# Altium PCB Monitor.PcbDoc
Units mm, origin at the board's own origin, x right, y up, seen from the top; angles counter-clockwise.
Board outline 67.82 x 63.5 mm, 2 copper layers (Top Layer, Bottom Layer), stack 1.671 mm thick; 38 components, 28 nets, 87 pads, 4 vias.
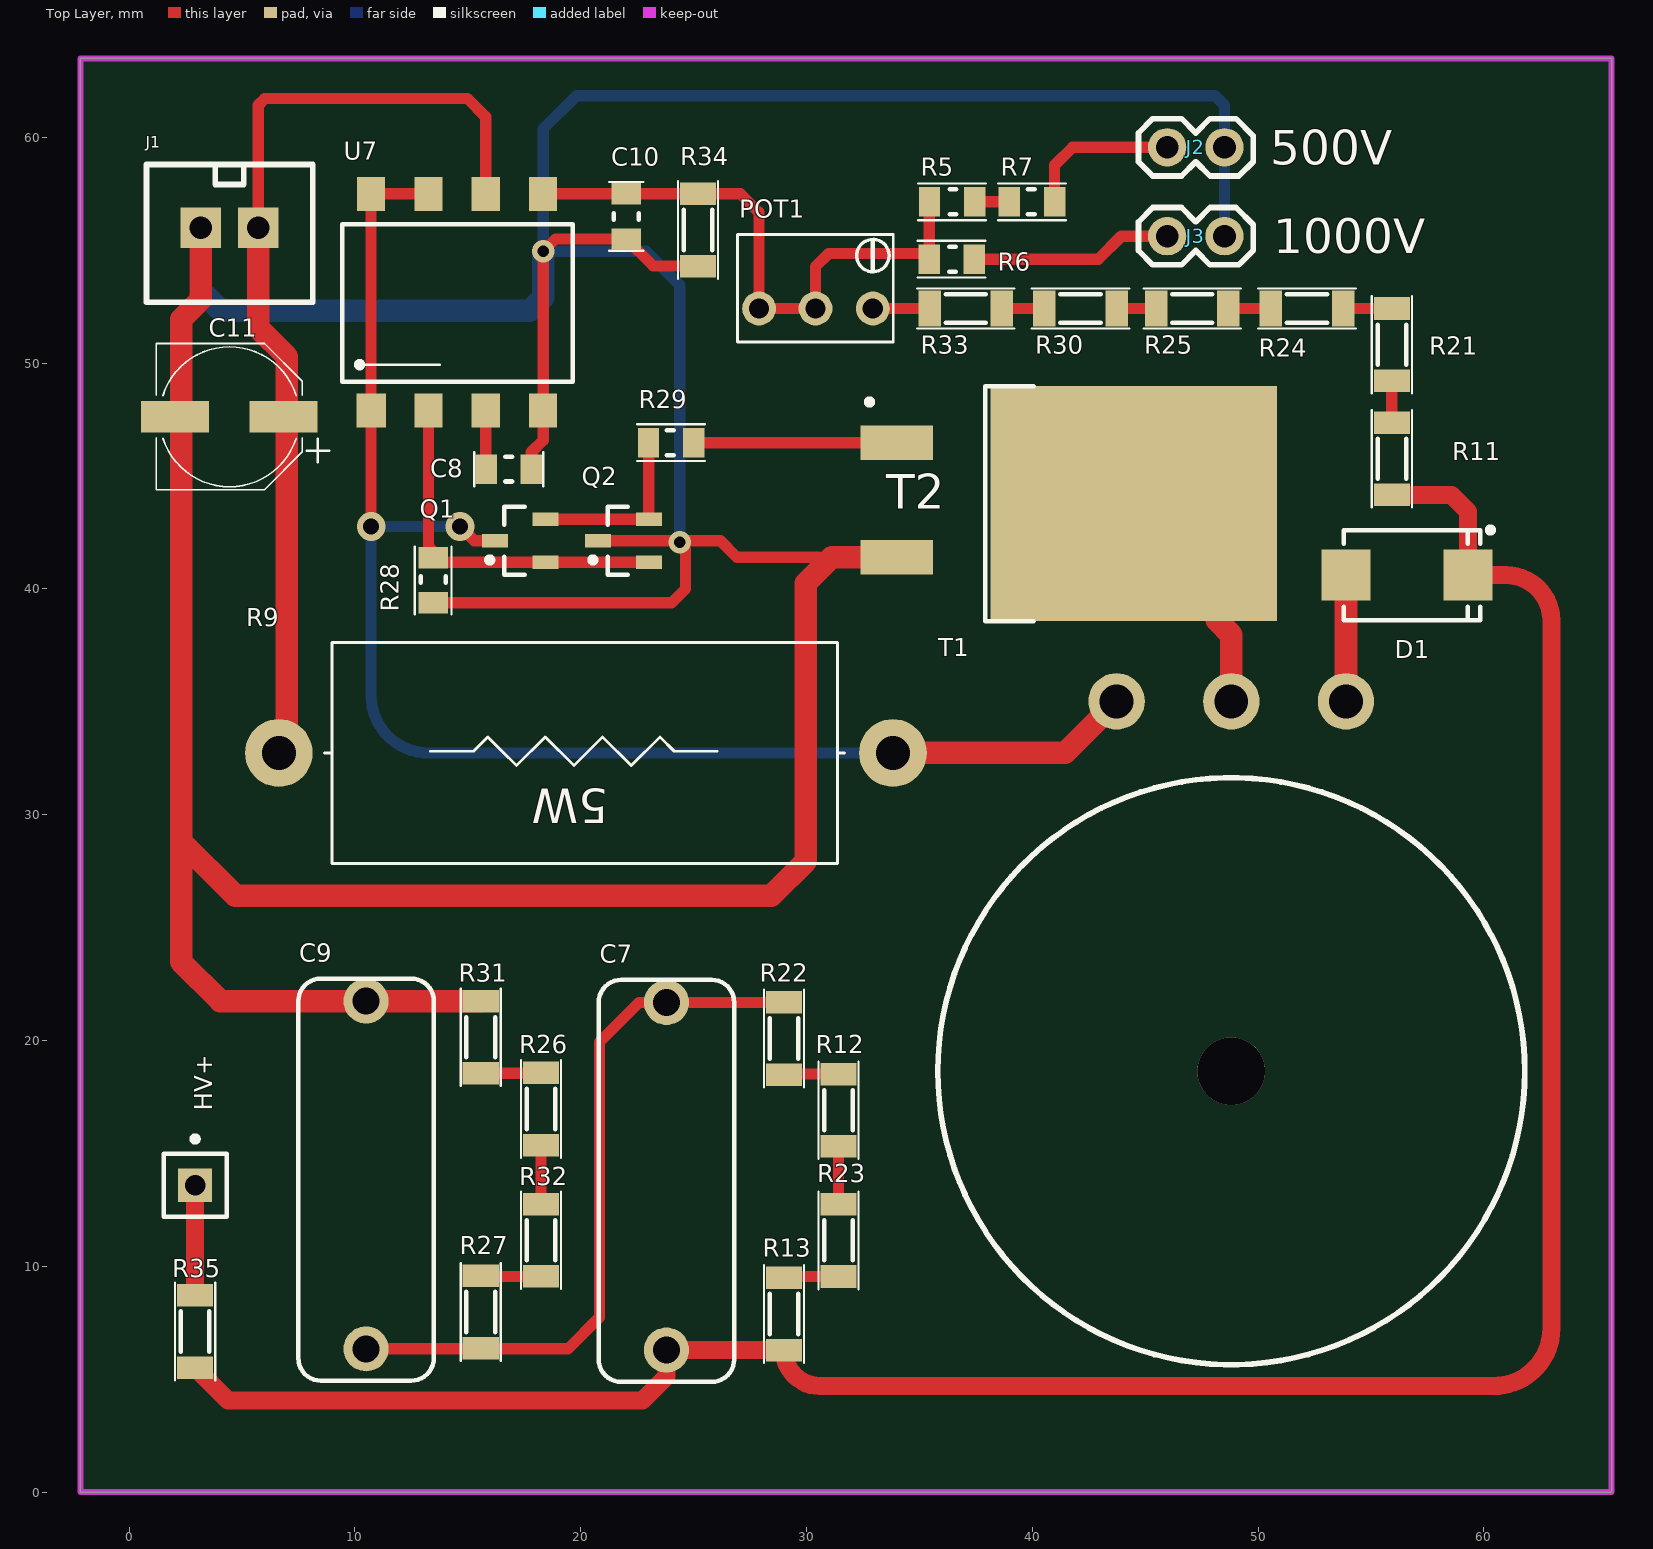
[diagram p0: Top Layer view]
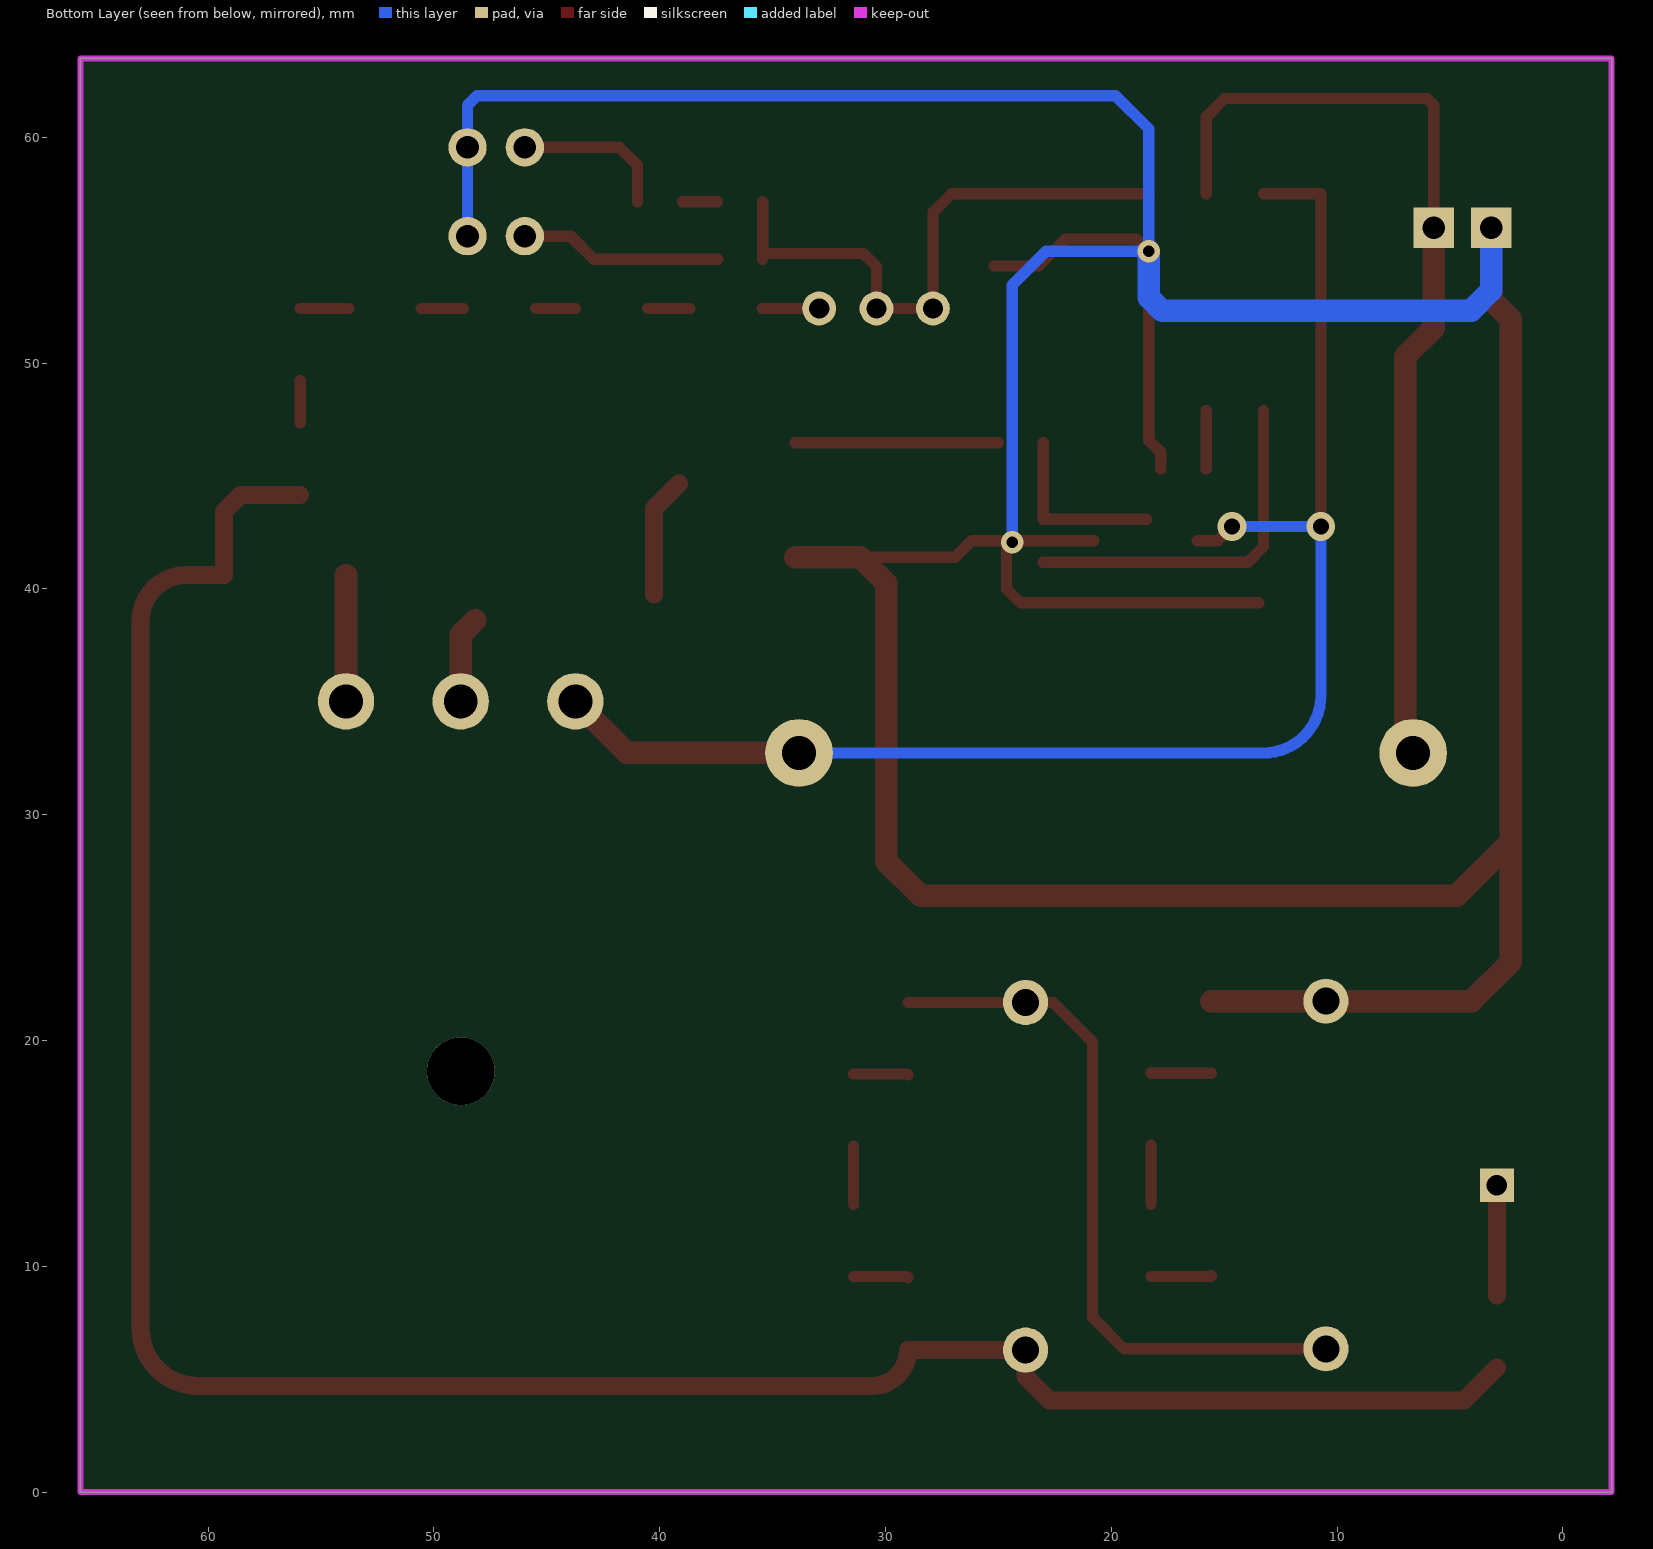
[diagram p1: Bottom Layer view, seen from below]

## Layer stack, top to bottom
Top Solder: solder mask 0.0102, Solder Resist, Dk 3.5
Top Layer: signal copper 0.0356
Dielectric 1: dielectric 1.6, FR-4, Dk 4.8
Bottom Layer: signal copper 0.0356
Bottom Solder: solder mask 0.0102, Solder Resist, Dk 3.5

## Board outline
-2.159,0 -2.159,63.5 65.659,63.5 65.659,0

## Design rules (kind name [scope] priority, off if disabled: settings)
Clearance Clearance_1 [(InNet('inprobe+') OR InNet('PROBE+') OR InNet('PROBE-'))] p1: gap=1 ignorepadtopadclearanceinfootprint=FALSE
Clearance [All] p2: gap=0.2 ignorepadtopadclearanceinfootprint=FALSE
ComponentClearance [All] p1: gap=0 collisioncheckmode=3 verticalgap=0 showdistances=FALSE
Height [All] p1: minheight=0 maxheight=500 prefheight=12.7
PolygonConnect PolygonConnect_1 [ISVIA] p1: connectstyle=Direct reliefconductorwidth=0.254 reliefentries=4 polygonreliefangle="90 Angle" airgapwidth=0.254
PolygonConnect [All] p2: connectstyle=Relief reliefconductorwidth=0.4 reliefentries=4 polygonreliefangle="90 Angle" airgapwidth=0.254
RoutingVias [All] p1: holewidth=0.5 width=1 viastyle="Through Hole" minholewidth=0.5 minwidth=1 maxholewidth=0.5 maxwidth=1
SolderMaskExpansion [All] p1: expansion=0.102 istentingtop=FALSE
Width [All] p1: maxlimit=1 minlimit=0.3 preferedwidth=0.5
28 further rules are at their usual default settings.

## Components (designator, comment, footprint, x,y, rotation, side; value= is the part's Value field where it differs from the comment)
C7 "100nF" CAP-POLY-15 23.796,21.689 r270 top
C8 "1nF" C805 16.811,45.311 r180 top
C9 "100nF" CAP-POLY-15 10.494,21.745 r270 top
C10 "1nF" C805 22.018,56.503 r90 top
C11 "470uF" CAP-SMD-6 1.143,50.8 r270 top
D1 "UF4007" DO-214AA 56.595,40.612 r270 top
HV+ "Plug" PIN1 2.921,13.589 r0 top
J1 "CONN-2" XH-2 5.715,56.007 r180 top
J2 "jumper" Selector 45.974,59.563 r0 top
J3 "jumper" Selector 45.974,55.626 r0 top
POT1 "POT" "Multi Turn V" 32.94,52.423 r90 top
Q1 "BC817-40" SOT-23 17.319,42.136 r180 top
Q2 "BC807-16" SOT-23 21.891,42.136 r180 top
R5 "680" R805 36.449,57.15 r180 top
R6 "68K" R805 36.433,54.61 r180 top
R7 "22K" R805 39.989,57.15 r0 top
R9 "0.1" RES-5w 20.229,32.738 r180 top
R11 "2.2M" R1206 55.927,45.768 r270 top
R12 "2.2M" R1206 31.416,16.914 r270 top
R13 "2.2M" R1206 29.003,7.889 r270 top
R21 "2.2M" R1206 55.927,50.823 r270 top
R22 "2.2M" R1206 29.003,20.089 r270 top
R23 "2.2M" R1206 31.416,11.148 r270 top
R24 "2.2M" R1206 52.168,52.423 r0 top
R25 "2.2M" R1206 47.088,52.423 r0 top
R26 "2.2M" R1206 18.241,16.97 r270 top
R27 "2.2M" R1206 15.574,7.978 r270 top
R28 "2.2K" R805 13.462,40.386 r270 top
R29 "100" R805 24.003,46.482 r0 top
R30 "2.2M" R1206 42.135,52.423 r0 top
R31 "2.2M" R1206 15.574,20.145 r270 top
R32 "2.2M" R1206 18.241,11.153 r270 top
R33 "2.2M" R1206 37.055,52.423 r0 top
R34 "68K" R1206 25.193,55.903 r90 top
R35 "4.7K" R1206 2.921,7.112 r270 top
T1 "Transformer 2-1" trans-26 48.815,18.641 r0 top
T2 "IRF540S" D2PAK-2 39.243,43.942 r90 top
U7 "MC34063AG" SOP-8 14.555,52.703 r90 top

## Footprints (in the part's own frame and the unit in brackets; to place one, negate y for a bottom-side part, rotate by r counter-clockwise, add the part's x,y. Pads: shape width x height; smd on the part's side, far side on the other; paste and mask are expansions set on the pad)
C805 [mm]
  rect 0.95x1.3 smd: 1(-1,0) 2(1,0)
  silkscreen extent -1.52,-0.76 1.52,0.76, body extent -1,-0.62 1,0.63, height 0.78
CAP-POLY-15 [mm]
  round 2 hole 1.2: 1(0,0) 2(15.4,0)
  silkscreen extent -1,-3 16.81,3, body extent -0.4,-2.89 16,2.91, height 11
CAP-SMD-6 [mil]
  rect 55x118 smd: 1(125,224) 2(125,35)
  silkscreen extent -3,2 252,304, body extent 5,-10 243,270, height 215
D2PAK-2 [mm]
  rect 1.524x3.2 smd: 1(2.54,5.25) 3(-2.54,5.25)
  rect 10.414x12.7 smd: 4(-0.16,-5.25)
  silkscreen extent -5.36,-0.81 5.04,6.57, body extent -5.5,-9.78 5.17,6.1, height 4.83
DO-214AA [mm]
  rect 2.26x2.16 smd: 1(0,-2.7) 2(0,2.7)
  silkscreen extent -2.12,-2.8 2,3.83, body extent -1.8,-2.7 1.8,2.7, height 2.3
"Multi Turn V" [mm]
  round 1.5 hole 0.9: 1(0,0) 2(0,2.54) 3(0,5.04)
  silkscreen extent -1.48,-0.9 3.28,5.99, body extent -1.42,-0.86 3.28,5.94, height 8.2
PIN1 [mm] "Connector; Plug"
  rect 1.5x1.5 hole 0.9: 1(0,0)
  silkscreen extent -1.4,-1.4 1.4,2.17
R805 [mm]
  rect 0.95x1.3 smd: 1(1,0) 2(-1,0)
  silkscreen extent -1.5,-0.81 1.5,0.81, body extent -1,-0.61 1,0.64, height 0.78
R1206 [mm]
  rect 1x1.6 smd: 1(1.6,0) 2(-1.6,0)
  silkscreen extent -2.16,-0.89 2.16,0.89, body extent -1.6,-0.8 1.6,0.8, height 1
RES-5w [mm]
  round 3 hole 1.5: 1(13.6,0) 2(-13.6,0)
  silkscreen extent -11.45,-4.9 11.58,4.9, body extent -13.15,-4.85 13.25,4.85, height 9.21
Selector [mm]
  round 1.7 hole 1: 1(2.54,0) 2(0,0)
  silkscreen extent -1.27,-1.27 3.81,1.27, body extent -1.24,-1.3 3.84,1.24, height 16.15
SOP-8 [mm]
  rect 1.5x1.3 smd: 1(-4.8,3.84)
  rect 1.5x1.25 smd: 2(-4.8,1.3) 3(-4.8,-1.24) 4(-4.8,-3.78) 5(4.8,-3.78) 6(4.8,-1.24) 7(4.8,1.3) 8(4.8,3.84)
  silkscreen extent -3.53,-5.1 3.45,5.11, body extent -4.97,-4.8 5.03,4.86, height 3.85
SOT-23 [mm]
  rect 1.15x0.6 smd: 1(-1.125,0.95) 2(-1.125,-0.95) 3(1.125,0)
  silkscreen extent -0.2,-1.5 1.47,1.5, body extent -1.13,-1.5 1.13,1.5, height 1.2
trans-26 [mm]
  round 3 hole 3: 0(0,0)
  round 2.5 hole 1.5: 1(-5.08,16.383) 2(0,16.383) 3(5.08,16.383)
  silkscreen extent -13,-13 13,13
XH-2 [mm]
  rect 1.8x1.8 hole 1: 1(0,0) 2(2.54,0)
  silkscreen extent -2.41,-2.79 4.95,3.3, body extent -2.43,-2.8 4.97,3.3, height 7

## Part data
C7 C8 C9 C10: library part Cap, "Capacitor", Designer="Parsa Malekpour"
C11: library part CAP-POL, "Polar Capacitor", Voltage=10V
D1: library part "Diode 1N4007", "1 Amp General Purpose Rectifier", Code_JEDEC=DO-204-AL, ComponentLink1Description="Manufacturer Link", ComponentLink1URL=http://www.fairchildsemi.com/, ComponentLink2Description=Datasheet, ComponentLink2URL=http://www.fairchildsemi.com/ds/1N%2F1N4001.pdf, DatasheetVersion=1998, LatestRevisionDate=17-Jul-2002, LatestRevisionNote="Re-released for DXP Platform.", PackageDescription="Diode, Axial; Body 5.2 x 2.7 mm (LxDia. max), Lead Dia. 0.86 mm (max)", PackageReference=DO-41, PackageVersion=Aug-1999, Published=8-Jun-2000, Publisher="Altium Limited"
J2 J3: library part "Jumper Select", "Jumper wire"
POT1: library part R-POT, "Varible Resistor", Resistance=1M
Q1: "NPN General Purpose Amplifier", ComponentLink1Description="Manufacturer Link", ComponentLink1URL=http://www.fairchildsemi.com/, ComponentLink2Description="Discontinuation Notice", ComponentLink2URL=http://www.fairchildsemi.com/obsolete/obs.jsp, DatasheetVersion=1997, LatestRevisionDate=20-Nov-2009, LatestRevisionNote="IPC-7351 Footprint Added.", PackageDescription="3-Pin SOT-23 Package 0.95 mm Pitch, 2.3 mm Lead Span", PackageReference=SOT-23A, PackageVersion=Sep-1998, Published=8-Jun-2000, Publisher="Altium Limited"
Q2: "PNP General Purpose Amplifier", ComponentLink1Description="Manufacturer Link", ComponentLink1URL=http://www.fairchildsemi.com/, ComponentLink2Description=Datasheet, ComponentLink2URL=http://www.fairchildsemi.com/ds/BC%2FBC807.pdf, DatasheetVersion=1997, LatestRevisionDate=20-Nov-2009, LatestRevisionNote="IPC-7351 Footprint Added.", PackageDescription="3-Pin SOT-23 Package 0.95 mm Pitch, 2.3 mm Lead Span", PackageReference=SOT-23A, PackageVersion=Sep-1998, Published=8-Jun-2000, Publisher="Altium Limited"
R5 R6 R7 R9 R11 R12 R13 R21 R22 R23 R24 R25 R26 R27 R28 R29 R30 R31 R32 R33 R34 R35: library part Resistor, "Resistor", Designer="Parsa Malekpour"
T1: library part "TRSNS 2-1", "Three-winding Transformer"
T2: library part IRF540, "N-Channel MOSFET"
HV+: LatestRevisionDate=17-Jul-2002, LatestRevisionNote="Re-released for DXP Platform.", Publisher="Altium Limited"

## Via types
v1: diameter 1.27, hole 0.711, Top Layer to Bottom Layer, tented both sides, 2 vias
v2: diameter 1, hole 0.5, Top Layer to Bottom Layer, tented both sides, 2 vias

## Nets (pads, with @x,y where several pads share a name; then routed paths per layer and width w, separated by ;. In a path a pad name is that pad's centre, name@x,y a point inside that pad or via, vN(x,y) a via of type N, cw(c..) or ccw(c..) an arc to the next point about the centre after c; other vN are vias at no path point)
+12V: C11.1 J1.1 R9.1 U7.6 | length 43.3
  Top Layer w0.5: J1.1 5.715,61.429 6.008,61.722 14.986,61.722 15.795,60.913 U7.6
  Top Layer w1: J1.1 5.715,51.562 6.985,50.292 6.985,33.094 R9.1
GND: C8.1 C9.1 C10.1 C11.2 J1.2 J2.1 J3.1 Q2.3 R28.1 R31.2 R34.2 T2.3 U7.4 | length 214.4
  Top Layer w0.5: R28.1 24.019,39.386 24.638,40.005 v2@24.638,41.755 ; C8.1 17.811,46.057 18.335,46.581 U7.4 v2(18.335,54.959) 18.88,55.503 C10.1 23.218,54.303 R34.2 ; Q2.3 v2@24.257,42.136 ; v2@24.384,42.136 26.19,42.136 26.924,41.402 30.543,41.402
  Top Layer w1: J1.2 3.175,52.818 2.3,51.943 2.3,28.815 ; R31.2 C9.1 4.036,21.745 2.3,23.481 2.3,28.815 ; T2.3 31.115,41.402 29.972,40.259 29.972,27.94 28.448,26.416 4.699,26.416 2.3,28.815
  Bottom Layer w0.5: v2(24.384,42.073) 24.384,53.467 22.892,54.959 v2(18.335,54.959) 18.335,60.372 19.812,61.849 48.094,61.849 48.514,61.429 J2.1 J3.1
  Bottom Layer w1: J1.2 3.175,53.213 4.064,52.324 17.749,52.324 18.335,52.91 v2(18.335,54.959)
HV: C7.2 D1.2 R11.1 R13.1 R35.1 | length 107.3
  Top Layer w0.8: R35.1 4.369,4.064 22.733,4.064 23.796,5.127 C7.2 R13.1 ccw(c30.594,6.289) 30.594,4.699 60.452,4.699 ccw(c60.452,7.239) 61.312,4.849 ccw(c60.452,7.239) 62.842,6.379 ccw(c60.452,7.239) 62.992,7.239 62.992,38.608 ccw(c60.988,38.608) 62.642,39.739 ccw(c60.988,38.608) 62.119,40.262 ccw(c60.988,38.608) 60.988,40.612 D1.2 59.295,43.434 58.561,44.168 R11.1
NetC7_1: C7.1 C9.2 R22.2 R27.1 | length 32
  Top Layer w0.5: C9.2 19.431,6.345 20.828,7.742 20.828,19.939 22.578,21.689 C7.1 R22.2
NetC8_2: C8.2 U7.3 | length 2.6
  Top Layer w0.5: U7.3 15.795,45.327 C8.2
NetC10_2: C10.2 POT1.2 POT1.3 R5.1 R6.1 R34.1 U7.5 | length 26.3
  Top Layer w0.5: U7.5 C10.2 R34.1 27.079,57.503 27.9,56.682 POT1.3 POT1.2 30.4,54.276 30.988,54.864 R6.1@35.433,54.864 ; R6.1 R6.1@35.433,54.864 ; R5.1 35.433,57.134 R6.1@35.433,54.864
NetD1_1: D1.1 T1.3 | length 5.6
  Top Layer w1: T1.3 D1.1
NetHV+_1: HV+.1 R35.2 | length 5.1
  Top Layer w0.8: HV+.1@2.794,13.716 HV+.1 R35.2
NetJ2_2: J2.2 R7.1 | length 6.9
  Top Layer w0.5: R7.1 40.989,58.769 41.783,59.563 J2.2
NetJ3_2: J3.2 R6.2 | length 9
  Top Layer w0.5: R6.2 42.926,54.61 43.942,55.626 J3.2
NetPOT1_1: POT1.1 R33.2 | length 2.5
  Top Layer w0.5: POT1.1 R33.2
NetQ1_1: Q1.1 Q2.1 R28.2 U7.2 | length 16.1
  Top Layer w0.5: U7.2 13.255,41.882 13.951,41.186 Q1.1 Q2.1
NetQ1_2: Q1.2 Q2.2 R29.2 | length 8
  Top Layer w0.5: Q1.2 Q2.2 R29.2@23.016,46.482
NetQ1_3: Q1.3 R9.2 T1.1 U7.1 U7.7 U7.8 | length 65.9
  Top Layer w0.5: v1(10.715,42.771) U7.1 U7.8 U7.7 ; v1(14.652,42.771) 15.287,42.136 Q1.3
  Top Layer w1: R9.2 41.449,32.738 T1.1
  Bottom Layer w0.5: v1(14.652,42.771) v1(10.715,42.771) 10.715,35.278 ccw(c13.255,35.278) 13.255,32.738 R9.2
NetR5_2: R5.2 R7.2 | length 1.5
  Top Layer w0.5: R5.2 R7.2
NetR11_2: R11.2 R21.1 | length 1.9
  Top Layer w0.5: R11.2 R21.1
NetR12_1: R12.1 R23.2 | length 2.6
  Top Layer w0.5: R23.2 R12.1
NetR12_2: R12.2 R22.1 | length 2.4
  Top Layer w0.5: R22.1 29.028,18.514 R12.2
NetR13_2: R13.2 R23.1 | length 2.4
  Top Layer w0.5: R13.2 29.062,9.548 R23.1
NetR21_2: R21.2 R24.1 | length 2.2
  Top Layer w0.5: R24.1 R21.2
NetR24_2: R24.2 R25.1 | length 1.9
  Top Layer w0.5: R25.1 R24.2
NetR25_2: R25.2 R30.1 | length 1.8
  Top Layer w0.5: R30.1 R25.2
NetR26_1: R26.1 R32.2 | length 2.6
  Top Layer w0.5: R32.2 R26.1
NetR26_2: R26.2 R31.1 | length 2.7
  Top Layer w0.5: R31.1 18.216,18.545 R26.2
NetR27_2: R27.2 R32.1 | length 2.7
  Top Layer w0.5: R27.2 15.599,9.553 R32.1
NetR29_1: R29.1 T2.1 | length 9
  Top Layer w0.5: R29.1 T2.1
NetR30_2: R30.2 R33.1 | length 1.9
  Top Layer w0.5: R33.1 R30.2
NetT1_2: T1.2 T2.4 | length 9.2
  Top Layer w0.8: T2.4@39.144,44.676 40.259,43.561 T2.4@40.259,39.751
  Top Layer w1: T2.4@48.18,38.608 48.815,37.973 T1.2
pads on no net: T1.0

## Keep-outs
Keep-Out Layer:
  the board outline again, w0.254

## Silkscreen, mask and mechanical layers (free items; w line width, h text height)
Top Overlay:
  text "500V" at 50.546,58.801 h1.52
  text "1000V" at 50.673,54.864 h1.52

## Text inside footprints (layer, text, board x,y; h text height)
R9: Top Overlay "5W" at 21.219,31.161 h1.52 r180